# EAGLE board Brightness (EAGLE 7.2.0)
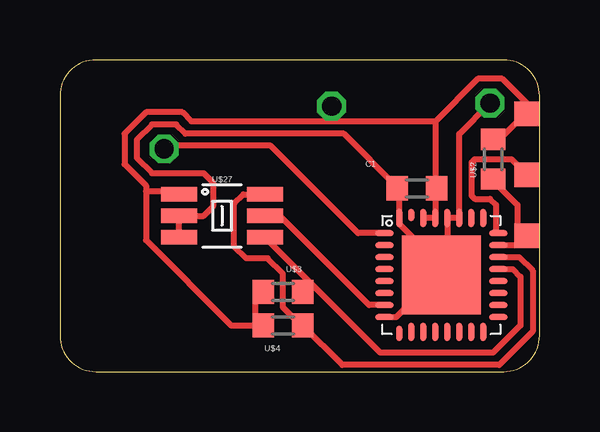
[diagram p0: board, top side]
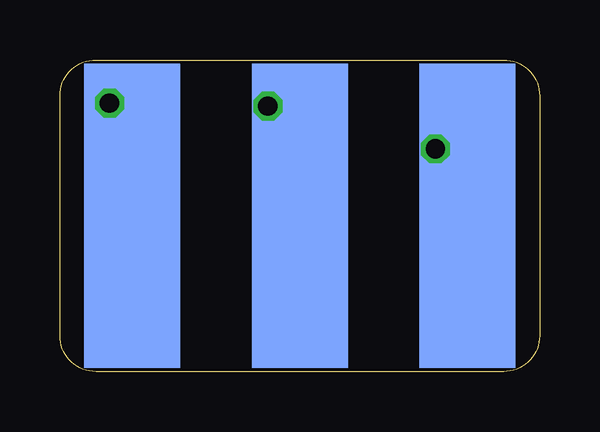
[diagram p1: board, bottom side, seen from below]

Size 20 x 13 mm. Coordinates in mm from the lower left corner, seen from the top.
Copper layers (1*16): Top 0.035mm / dielectric 1.5mm / Bottom 0.035mm
Design rules "Bilex DRU *": minimum track width 10mil, minimum drill 24mil, track to track 10mil, track to pad 10mil, pad to pad 10mil, via to via 10mil, smd to smd 10mil, copper to edge 1mil, drill to drill 8mil, minimum pad ring 10mil, minimum via ring 8mil, stop-mask expansion 4mil, vias tented up to drill 0mil, thermal gap 10mil

## Footprints (pad centres in the part's own frame; a part is rotated, then mirrored left to right if it is on the bottom)
603 = smd 0.889 x 1.016: 1 -0.826,0; 2 0.826,0
CARRIER_SMD2_3POL = smd 4 x 12.7 bottom: GND -6.985,0; RX/TX 6.985,0; VCC 0,0 | smd 1.016 x 1.016: RST -9.461,0.826; TST -9.461,-1.714; VCC'' -9.461,-4.255
QFN32 = smd 0.762 x 0.254: 1 -2.375,1.75; 2 -2.375,1.25; 3 -2.375,0.75; 4 -2.375,0.25; 5 -2.375,-0.25; 6 -2.375,-0.75; 7 -2.375,-1.25; 8 -2.375,-1.75; 17 2.375,-1.75; 18 2.375,-1.25; 19 2.375,-0.75; 20 2.375,-0.25; 21 2.375,0.25; 22 2.375,0.75; 23 2.375,1.25; 24 2.375,1.75 | smd 0.254 x 0.635: 9 -1.75,-2.438 | smd 0.254 x 0.762: 10 -1.25,-2.375; 11 -0.75,-2.375; 12 -0.25,-2.375; 13 0.25,-2.375; 14 0.75,-2.375; 15 1.25,-2.375; 16 1.75,-2.375; 25 1.75,2.375; 26 1.25,2.375; 27 0.75,2.375; 28 0.25,2.375; 29 -0.25,2.375; 30 -0.75,2.375; 32 -1.75,2.375 | smd 0.254 x 0.508: 31 -1.25,2.5 | smd 3.302 x 3.302: TP 0,0
TSL2561T = smd 1.5 x 0.6: 1 -1.8,0.9; 2 -1.8,0; 3 -1.8,-0.9; 4 1.8,-0.9; 5 1.8,0; 6 1.8,0.9

## Placement (x,y rotation side)
C1  100n  [603]  14.89,7.64 180 top
U$1  CARRIER_SMD2SMD2_3POL  [CARRIER_SMD2_3POL]  10,6.5 180 top
U$2  10k  [603]  18.06,8.86 90 top
U$3  4.7k  [603]  9.3,3.32 180 top
U$4  4.7k  [603]  9.3,1.92 0 top
U$10  MSP430G2553  [QFN32]  15.9,4.03 0 top
U$27  TSL2561T  [TSL2561T]  6.76,6.5 0 top

## Library data of the parts
C1 U$1-U$4 U$10 U$27 = thar

## Nets
GND: C1.2 U$1.GND U$10.8 U$10.27 U$10.28 U$10.32 U$10.TP U$27.2 U$27.3
N$2: U$4.2 U$10.22 U$27.6
N$3: U$1.TST U$10.24
N$4: U$1.RST U$2.1 U$10.23
N$5: U$3.1 U$10.21 U$27.4
N$6: U$10.7 U$27.5
N$12: U$1.RX/TX U$10.1
VCC: C1.1 U$1.VCC U$1.VCC'' U$2.2 U$3.2 U$4.1 U$10.29 U$10.30 U$27.1

## Tracks (layer width: path | path; a pad name or v marks a point on that pad's centre or on a via)
GND  (via drill 0.8)
  Top 0.254: 16.43,4.35 16.19,5.38 16.16,5.35 | 16.43,4.35 16.48,3.06 U$10.TP 15.01,2.94 14.89,3.14 14.03,2.28 U$10.8 | 16.15,4.72 U$10.28 U$10.27 16.65,9.91 v17.93,11.2 | 16.15,4.72 16.15,4.42 16.43,4.35 | 16.15,4.72 15.52,5.35 14.76,5.55 14.15,6.16 U$10.32 14.15,7.36 14.25,7.84 14.25,7.7 C1.2 14.06,7.7 11.84,9.93 5.24,9.93 4.85,10.31 3.84,10.31 3.2,9.67 3.2,8.91 3.84,8.28 6,8.28 6.38,7.89 6.38,6.88 6,6.5 U$27.2 U$27.3
  Bottom 0.254: 18,6.5 17.93,6.57 v17.93,11.2 16.98,10.25 U$1.GND
N$2
  Top 0.254: U$10.22 19.14,4.78 19.71,4.21 19.71,1.67 18.32,0.27 11.78,0.27 U$4.2 10.06,1.92 9.3,2.69 9.3,4.08 8.66,4.72 7.78,4.72 7.27,5.23 7.27,7.01 7.65,7.39 8.55,7.39 U$27.6
N$3
  Top 0.254: 19.61,7.88 19.46,8.02 19.5,8.18 | U$10.24 18.19,5.78 18.19,6.95 17.93,7.21 17.3,7.21 17.17,7.33 17.17,8.73 17.3,8.86 18.82,8.86 19.5,8.18 | 19.5,8.18 U$1.TST
N$4
  Top 0.254: 19.46,5.48 19.5,5.38 | 19.46,5.48 19.5,5.69 | 19.5,5.69 19.08,5.74 19.08,6.95 18.06,7.97 U$2.1 | U$10.23 19.28,5.28 19.46,5.48 | 19.5,5.69 19.48,5.69 U$1.RST
N$5
  Top 0.254: U$10.21 18.88,4.28 19.2,3.96 19.2,1.92 18.06,0.78 13.36,0.78 10.51,3.64 | 10.51,3.64 8.54,5.62 U$27.4 | U$3.1 10.19,3.32 10.51,3.64
N$6
  Top 0.254: U$27.5 9.17,6.5 12.89,2.78 U$10.7
N$12  (via drill 0.8)
  Top 0.254: U$10.1 12.43,5.78 8.79,9.42 4.47,9.42 v4.35,9.29
  Bottom 0.254: U$1.RX/TX 3.01,9.36 v4.35,9.29
VCC  (via drill 0.8)
  Top 0.254: U$10.29 | 15.65,10.43 15.65,8.02 | 15.65,8.02 U$10.29 | 15.78,7.77 15.71,8.02 | 15.71,8.02 15.65,8.02 | U$10.29 U$10.30 | C1.1 15.71,8.02 | 19.5,10.52 19.46,10.56 | U$2.2 18.12,9.48 19.2,10.56 19.2,10.51 19.46,10.56 | 19.52,10.62 19.65,10.75 19.65,11.01 18.44,12.21 17.43,12.21 15.65,10.43 | 19.52,10.62 19.46,10.56 | 15.65,10.43 11.33,10.43 | 11.33,10.43 5.49,10.43 5.11,10.81 3.58,10.81 2.7,9.93 2.7,8.66 3.58,7.77 3.58,7.51 | 8.16,3.58 8.16,3.32 U$3.2 8.16,3 8.16,1.92 U$4.1 7.14,1.92 3.58,5.48 3.58,7.51 | U$27.1 5.22,7.4 | 5.22,7.4 5.36,7.26 | U$1.VCC'' 19.46,10.69 19.52,10.62 | v11.33,11.07 11.33,10.43 | 5.22,7.4 5.11,7.51 3.58,7.51
  Bottom 0.254: U$1.VCC 10,9.48 v11.33,11.07